# Altium PCB PCB5.PcbDoc
Units mm, origin at the board's own origin, x right, y up, seen from the top; angles counter-clockwise.
Board outline 53.09 x 47.37 mm, 2 copper layers (Top Layer, Bottom Layer); 7 components, 7 nets, 28 pads, 0 vias.
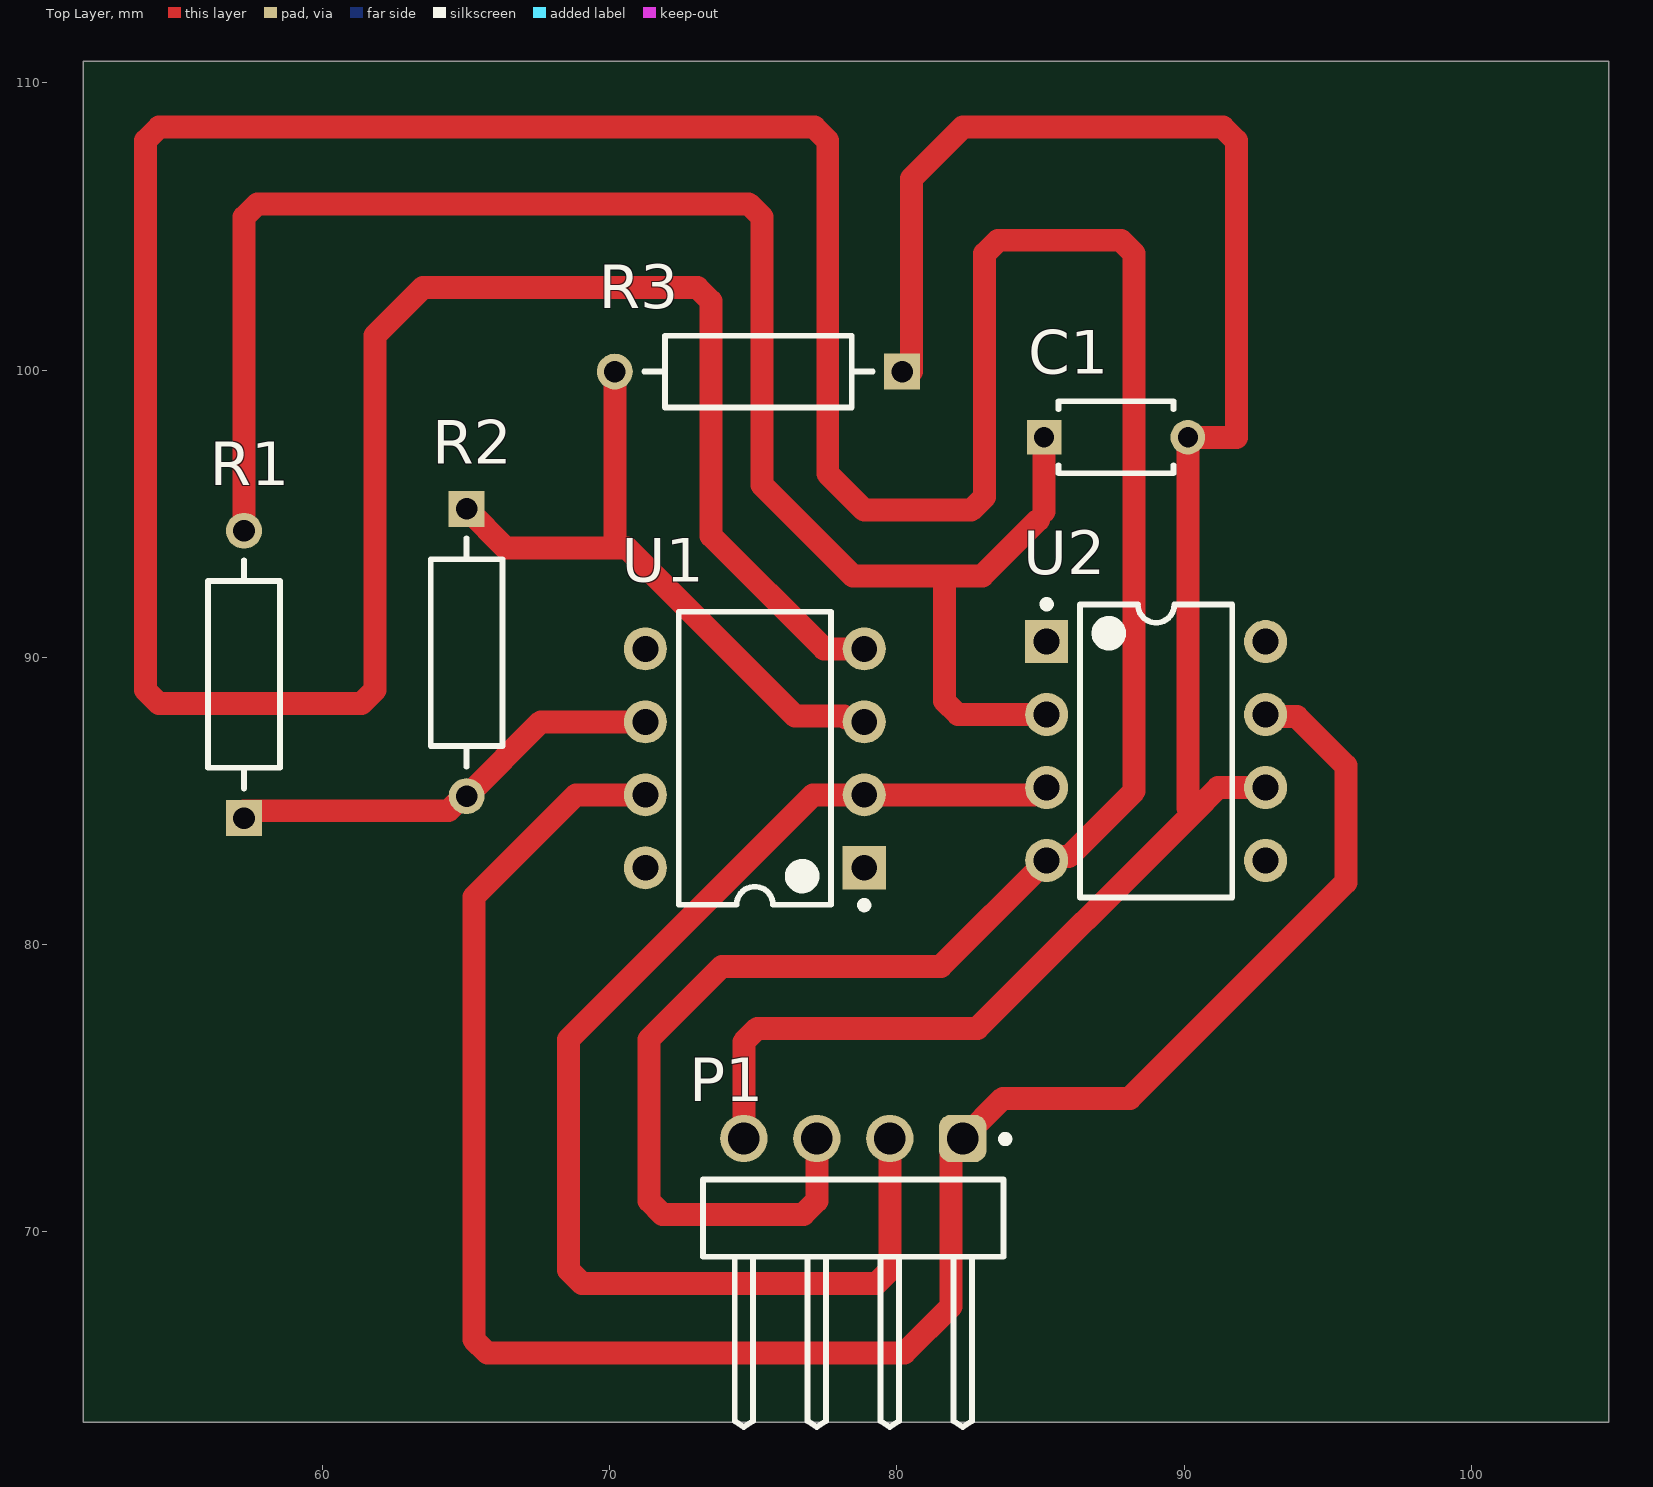
[diagram p0: Top Layer view]
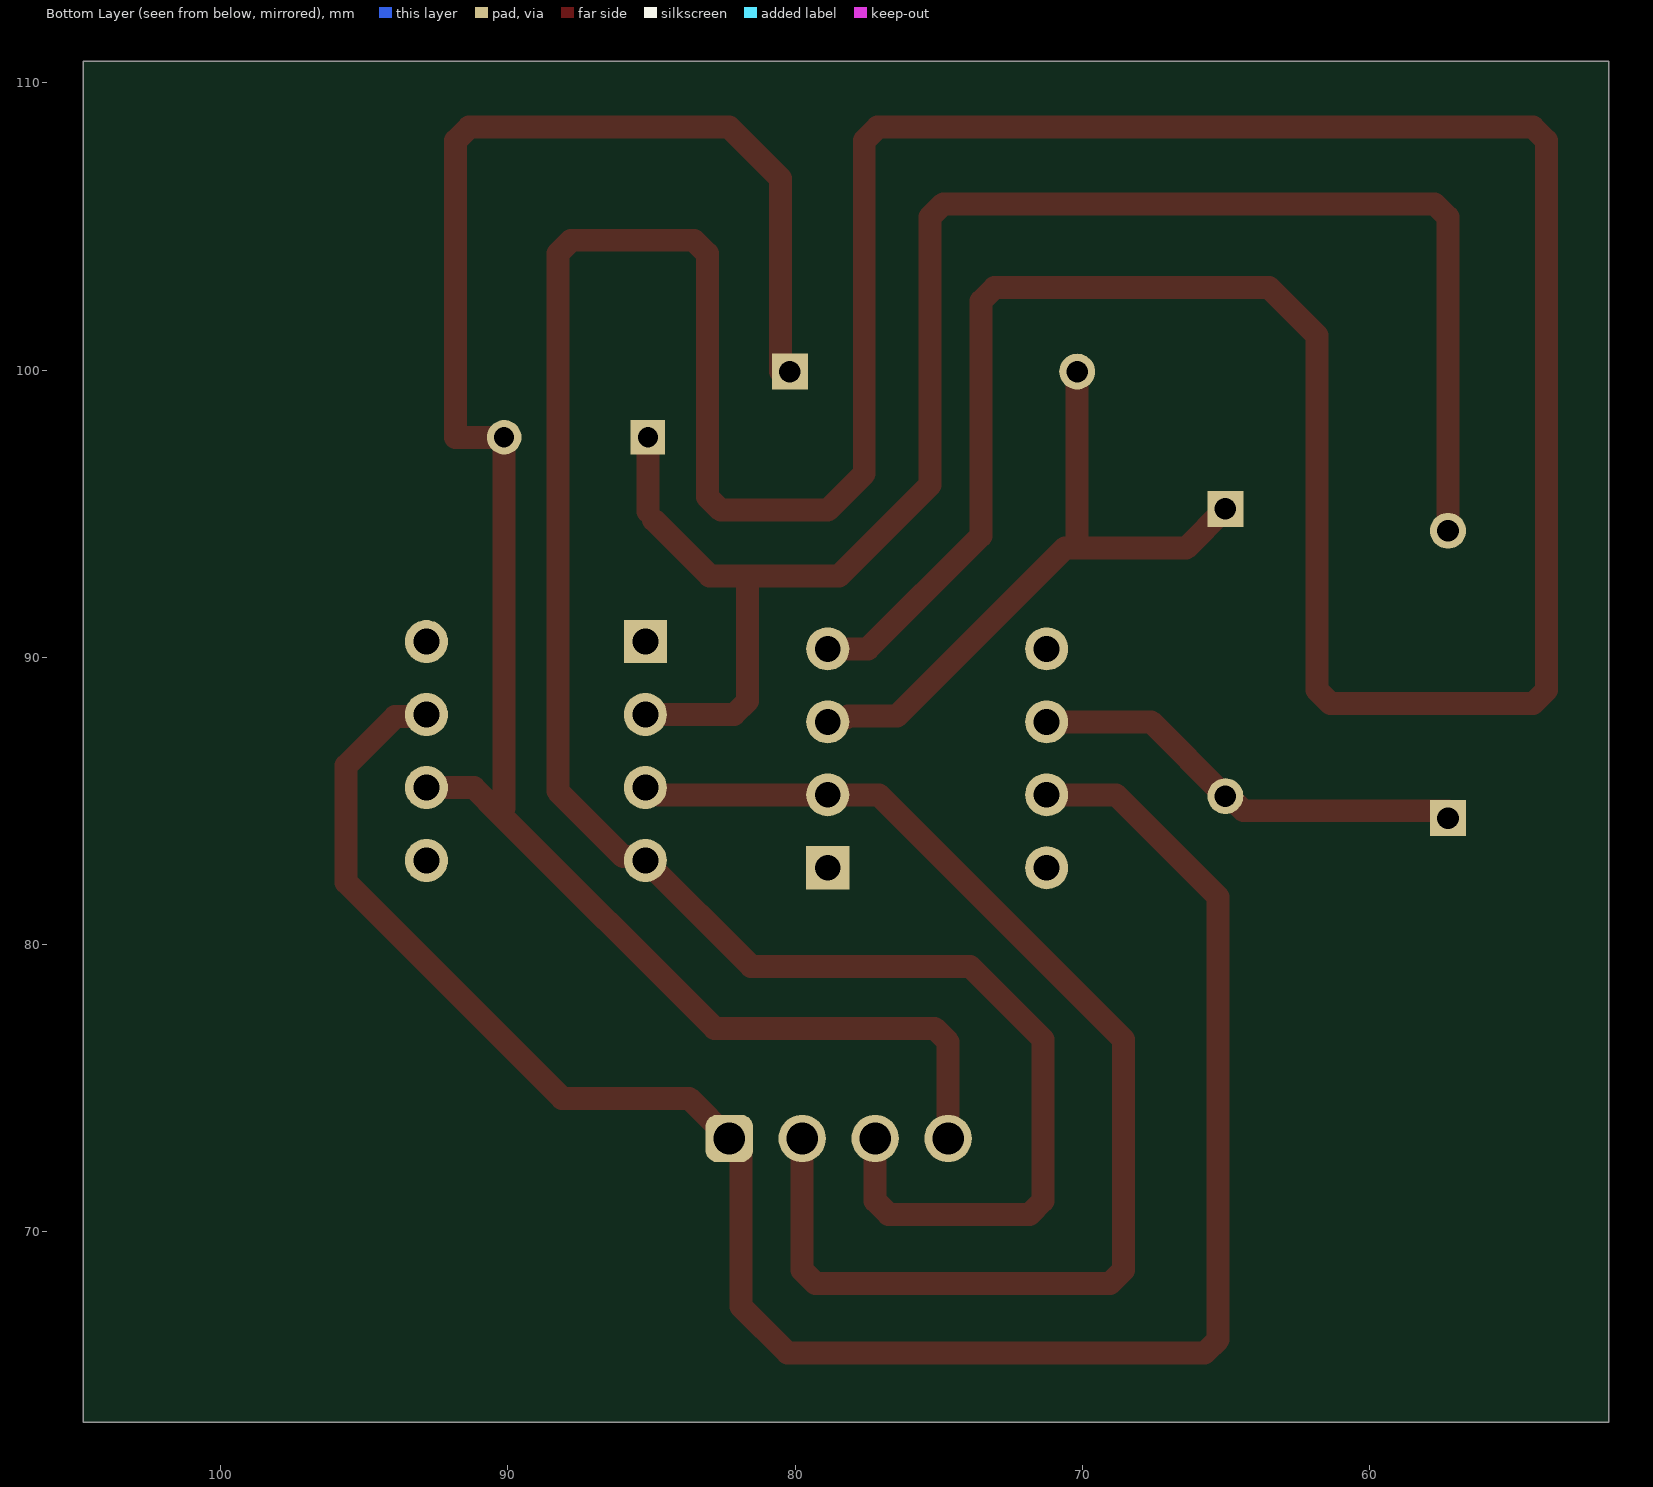
[diagram p1: Bottom Layer view, seen from below]
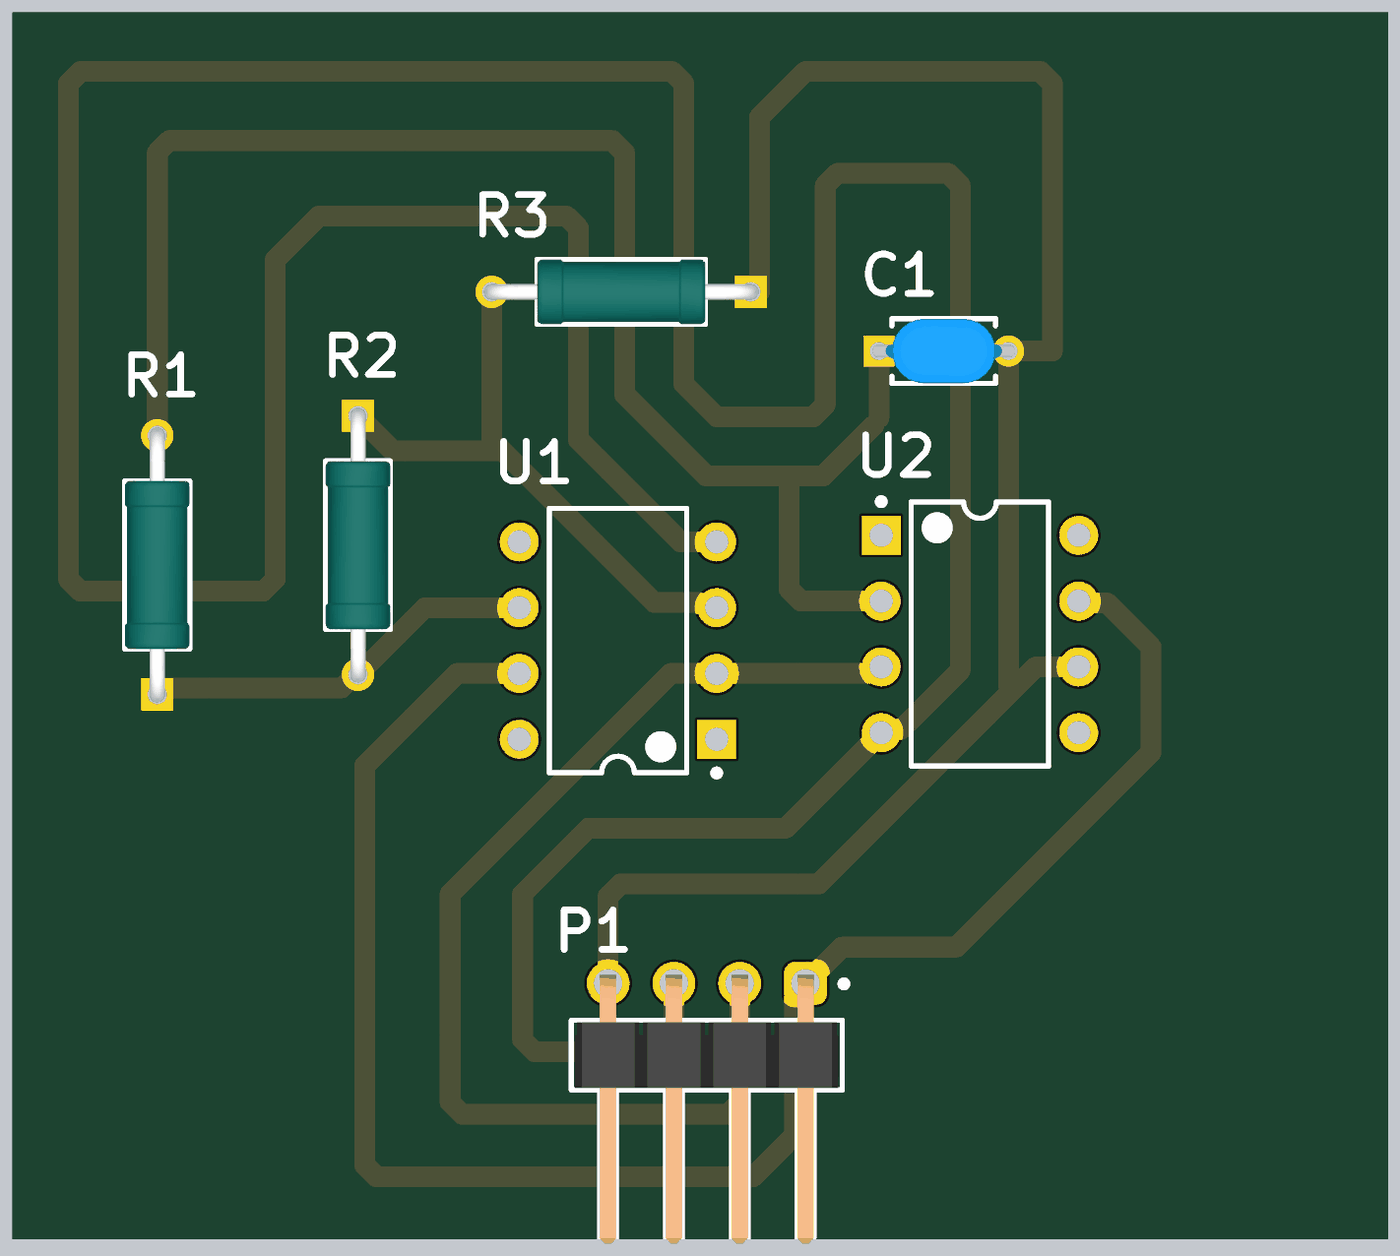
[diagram p2: 3D render of the assembled board from above, using the file's embedded part models]

## Layer stack, top to bottom
Top Solder: solder mask 0.0102, Solder Resist, Dk 3.5
Top Layer: signal copper 0.0356
Dielectric 1: dielectric 0.32, FR-4, Dk 4.8
Bottom Layer: signal copper 0.0356
Bottom Solder: solder mask 0.0102, Solder Resist, Dk 3.5

## Board outline
51.689,63.373 51.689,110.744 104.775,110.744 104.775,63.373

## Design rules (kind name [scope] priority, off if disabled: settings)
Clearance [All] p1: gap=0.5 ignorepadtopadclearanceinfootprint=FALSE
PolygonConnect [All] p1: connectstyle=Relief reliefconductorwidth=0.254 reliefentries=4 polygonreliefangle="90 Angle" airgapwidth=0.254
RoutingVias [All] p1: holewidth=0.711 width=1.27 viastyle="Through Hole" minholewidth=0.711 minwidth=1.27 maxholewidth=0.711 maxwidth=1.27
SolderMaskExpansion [All] p1: expansion=0.102 istentingtop=FALSE
SupplyNets "Schematic Supply Nets" [InNet('GND')] p1: voltage=0.000
Width [All] p1: maxlimit=1 minlimit=0.254 preferedwidth=0.8
30 further rules are at their usual default settings.

## Components (designator, comment, footprint, x,y, rotation, side; value= is the part's Value field where it differs from the comment)
C1 "0.1uF" FP-RDE0M1-MFG 87.63,97.663 r0 top
P1 "61300411021" 61300411021 78.486,70.485 r0 top
R1 "12K" FP-MRS25-MFG 57.277,89.408 r90 top
R2 "1K" FP-MRS25-MFG 65.024,90.17 r270 top
R3 "180" FP-MRS25-MFG 75.184,99.949 r180 top
U1 "LM741CN/NOPB" P0008A 75.057,86.487 r180 top
U2 "LM741CN/NOPB" P0008A 89.027,86.741 r0 top

## Footprints (in the part's own frame and the unit in brackets; to place one, negate y for a bottom-side part, rotate by r counter-clockwise, add the part's x,y. Pads: shape width x height; smd on the part's side, far side on the other; paste and mask are expansions set on the pad)
61300411021 [mm] "Pin Header, pitch 2.54 mm, THT, Angled, single row, 4p"
  rrect50% 1.65x1.65 hole 1.1: 1(3.81,2.77)
  round 1.65 hole 1.1: 2(1.27,2.77) 3(-1.27,2.77) 4(-3.81,2.77)
  silkscreen extent -5.23,-7.27 5.42,2.87, body extent -5.08,-7.27 5.08,3.09, height 2.58
FP-MRS25-MFG [mm]
  rect 1.25x1.25 hole 0.75 paste-2539.97 mask+0: 1(-5,0)
  round 1.25 hole 0.75 paste-2539.97 mask+0: 2(5,0)
  silkscreen extent -3.98,-1.25 3.98,1.25, body extent -5.72,-1.35 5.72,1.35, height 0.25
FP-RDE0M1-MFG [mm]
  rect 1.2x1.2 hole 0.7 paste-2539.97 mask+0: 1(-2.5,0)
  round 1.2 hole 0.7 paste-2539.97 mask+0: 2(2.5,0)
  silkscreen extent -2,-1.25 2,1.25, body extent -3.2,-1.35 3.2,1.35, height 0.25
P0008A [mm] "DIP, 8-Leads, Body 10.15x6.6mm, Pitch 2.54mm"
  rect 1.5x1.5 hole 0.9: 1(-3.81,3.81)
  round 1.5 hole 0.9: 2(-3.81,1.27) 3(-3.81,-1.27) 4(-3.81,-3.81) 5(3.81,-3.81) 6(3.81,-1.27) 7(3.81,1.27) 8(3.81,3.81)
  silkscreen extent -3.94,-5.1 2.65,5.23, body extent -3.95,-5.07 3.95,5.07, height 5.08

## Part data
C1: library part CMP-06035-051680-1, "Ceramic Capacitor 100nF ±10% 50V X7R Radial", Capacitance=100nF, Case/Package=Radial, Dielectric=X7R, Max Operating Temperature=125°C, Min Operating Temperature=-55°C, Package Quantity=2000, Resistor Type=Ceramic, Tolerance=10%, Voltage Rating=50V, Height=3.5mm, Height - Seated (Max)=0.236inch, Lead Diameter=0.5mm, Lead Free="Lead Free", Lead Pitch=0.197inch, Lead/Base Style=Kinked, Length=0.157inch, Mount="Through Hole", Packaging="Tape and Reel", Termination=Radial, Voltage Rating (DC)=50V, Width=3.5mm
P1: library part CMP-1502-01063-3, Color=Black, Contact Resistance=20mΩ, Current Rating=3A, Operating Supply Voltage=250V, Connector Type="Male Pin", Contact Material=Copper, Contact Mating Length=5.9944mm, Contact Plating=Gold, Gender=Male, Lead Pitch=2.54mm, Mount="Through Hole", NexarPartId=31153320, Number of Contacts=4, Number of Pins=4, Number of Positions=4, Number of Rows=1, Pitch=2.54mm, REACH SVHC=Unknown, RoHS=Compliant, Termination=Solder
R1 R2 R3: library part CMP-02408-000051-1, "RES 1K OHM 0.6W 1% AXIAL", Case/Package=Axial, Max Operating Temperature=155°C, Max Power Dissipation=600mW, Min Operating Temperature=-55°C, Package Quantity=5000, Resistance=1kR, Resistance Tolerance=1%, Resistor Type="Metal Film", Temperature Coefficient=50ppm/°C, Voltage Rating=350V, Construction=Cylindrical, Contact Plating=Tin, Diameter=2.5mm, Lead Diameter=0.6mm, Lead Free="Lead Free", Length=6.5mm, Military Standard=Not, Mount="Through Hole", Number of Pins=2, Number of Terminations=2, Packaging="Tape and Reel", Power Rating=600mW, Radiation Hardening=No, RoHS Compliant=Yes, Series=MRS25, Technology="THIN FILM", Termination=Axial, Tolerance=1%, Voltage Rating (DC)=350V, Weight=0.00776oz, Width=2.5mm
U1 U2: library part CMP-0055-00162-3, "Operational Amplifier, 8-pin MDIP, Pb-Free", Manufacturer="Texas Instruments", Package Reference=P0008A, PackageTopMarking=NSUZXYTTE#*LM*741CN, PowerWise=N, Code_JEDEC=MS-001-BA, ComponentLink1Description="Datasheet URL", ComponentLink1URL=http://www.ti.com/general/docs/lit/getliterature.tsp?genericPartNumber=LM741&fileType=pdf, CompType=Amplifiers, PackageDescription="MDIP, .365 x .250 x .130in, 8 Lead, .100in Pitch", PinCount=8, RoHS=Y

## Nets (pads, with @x,y where several pads share a name; then routed paths per layer and width w, separated by ;. In a path a pad name is that pad's centre, name@x,y a point inside that pad or via, vN(x,y) a via of type N, cw(c..) or ccw(c..) an arc to the next point about the centre after c; other vN are vias at no path point)
+vcc: P1.1 U1.7 U2.7 | length 70.8
  Top Layer w0.8: U1.7 68.834,85.217 65.278,81.661 65.278,66.255 65.747,65.786 80.264,65.786 81.879,67.401 P1.1@81.879,73.255 ; P1.1 83.693,74.652 88.114,74.652 95.631,82.169 95.631,86.233 93.924,87.94 92.908,87.94 U2.7
-VCC: P1.3 U1.4 U2.4 | length 176.7
  Top Layer w0.8: P1.3 77.216,71.081 76.747,70.612 71.843,70.612 71.374,71.081 71.374,76.708 73.914,79.248 81.534,79.248 U2.4 85.351,83.065 85.986,83.065 88.265,85.344 88.265,104.052 87.796,104.521 83.527,104.521 83.058,104.052 83.058,95.592 82.589,95.123 78.867,95.123 77.597,96.393 77.597,107.989 77.128,108.458 54.317,108.458 53.848,107.989 53.848,88.861 54.317,88.392 61.364,88.392 61.832,88.861 61.832,101.202 63.5,102.87 73.064,102.87 73.533,102.401 73.533,94.234 77.47,90.297 U1.4
GND: P1.2 U1.2 U2.3 | length 44.5
  Top Layer w0.8: P1.2 79.756,68.668 79.287,68.199 69.049,68.199 68.58,68.668 68.58,76.708 77.089,85.217 U1.2 84.774,85.217 85.028,85.471 U2.3
NetC1_1: C1.1 R1.2 U2.2 | length 61.1
  Top Layer w0.8: R1.2 57.277,105.322 57.746,105.791 74.842,105.791 75.311,105.322 75.311,95.997 78.471,92.837 81.661,92.837 ; 84.93,94.79 82.977,92.837 81.661,92.837 ; 85.13,95.083 C1.1 ; U2.2 82.13,88.011 81.661,88.48 81.661,92.837
NetC1_2: C1.2 P1.4 R3.1 U2.6 | length 69.3
  Top Layer w0.8: P1.4 74.676,76.62 75.145,77.089 82.804,77.089 90.297,84.582 ; R3.1@80.517,99.949 80.517,106.679 82.296,108.458 91.352,108.458 91.821,107.989 91.821,97.663 C1.2 90.13,84.749 90.297,84.582 ; U2.6 91.186,85.471 90.297,84.582
NetR1_1: R1.1 R2.2 U1.6 | length 15.3
  Top Layer w0.8: R1.1@57.277,84.662 64.394,84.662 R2.2@64.988,85.256 ; R2.2 67.611,87.757 U1.6
NetR2_1: R2.1 R3.2 U1.3 | length 23.1
  Top Layer w0.8: R2.1 66.389,93.805 70.184,93.805 ; R3.2 70.184,93.805 ; U1.3 78.733,87.891 78.238,87.891 78.166,87.963 76.454,87.963 70.612,93.805 70.184,93.805
pads on no net: U1.1 U1.5 U1.8 U2.1 U2.5 U2.8